# Altium PCB HANDS_FREE_ControlUnit_V1.PcbDoc (part 3 of 3)
Units mil, origin at the board's own origin, x right, y up, seen from the top; angles counter-clockwise.
Board outline 2372.03 x 3554.03 mil, 2 copper layers (Top Layer, Bottom Layer); 33 components, 66 nets, 337 pads, 84 vias.
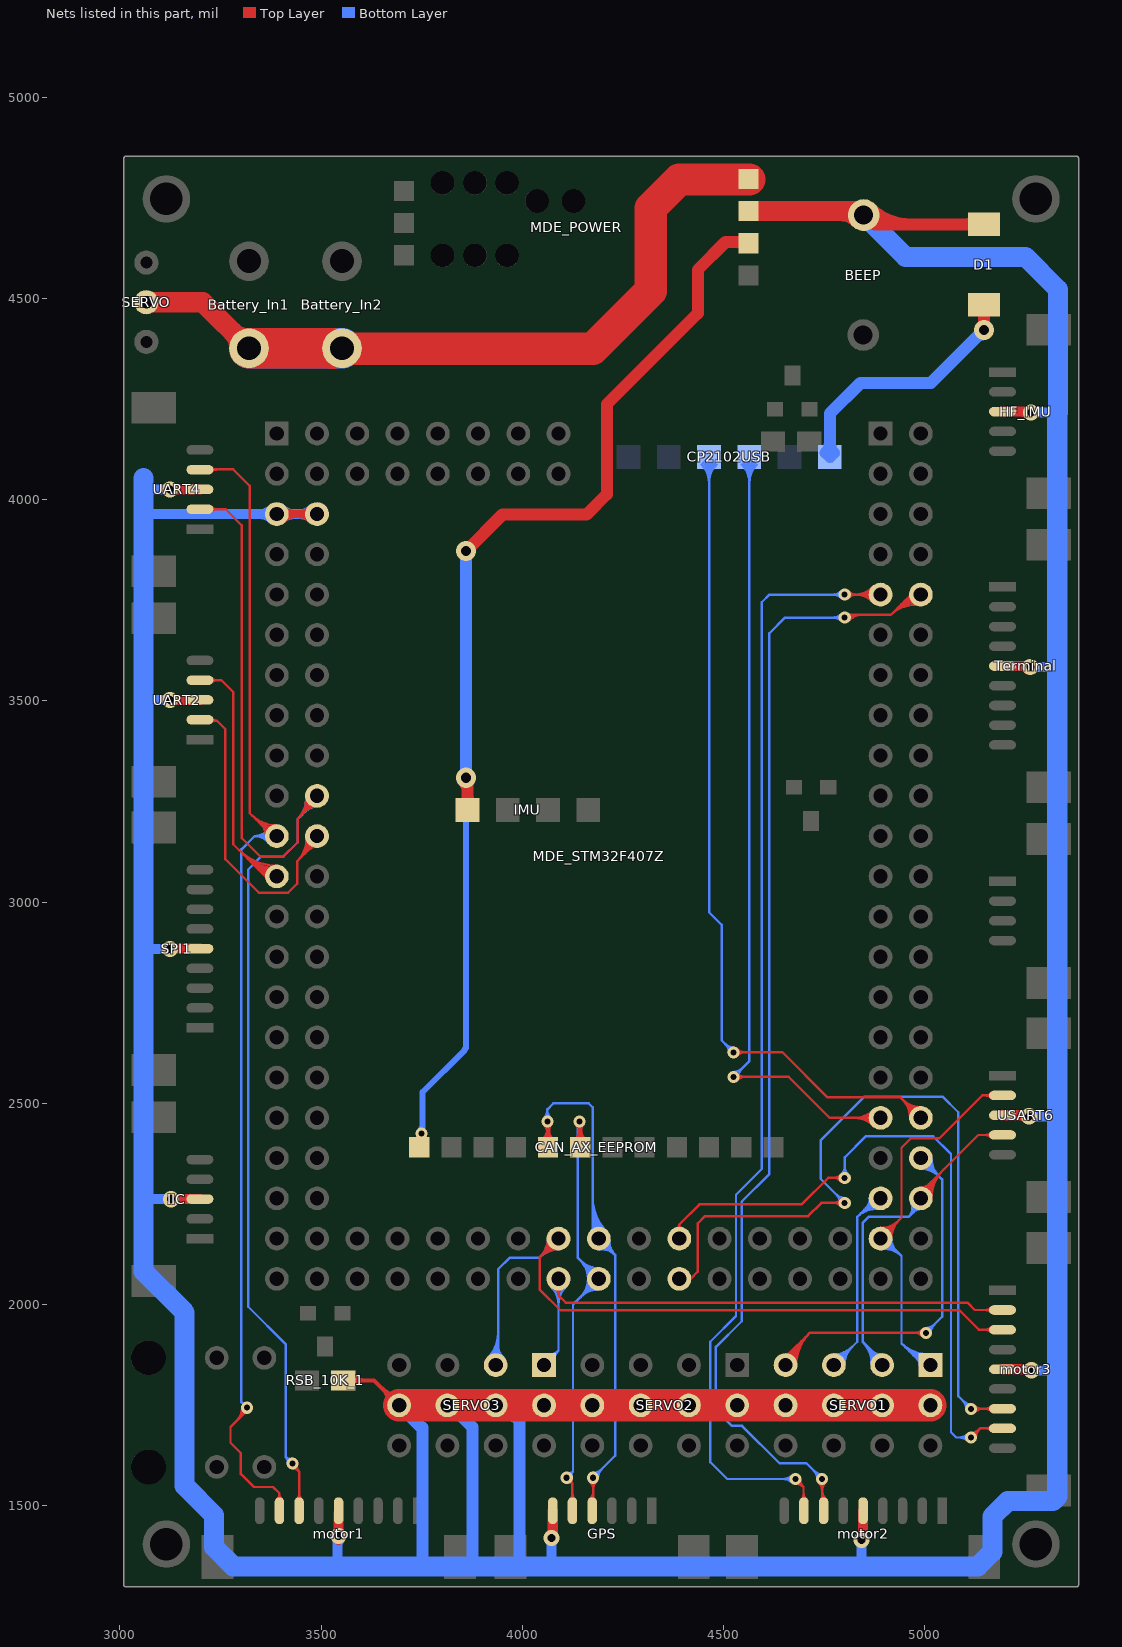
[diagram p3: the nets of this part, all layers, seen from the top]

## Via types
v1: diameter 30, hole 15, Top Layer to Bottom Layer, 70 vias
v2: diameter 40, hole 20, Top Layer to Bottom Layer, 11 vias
v3: diameter 50, hole 25, Top Layer to Bottom Layer, 3 vias

## Nets (pads, with @x,y where several pads share a name; then routed paths per layer and width w, separated by ;. In a path a pad name is that pad's centre, name@x,y a point inside that pad or via, vN(x,y) a via of type N, cw(c..) or ccw(c..) an arc to the next point about the centre after c; other vN are vias at no path point) (continued)
TIM2_ENCODR1_A: MDE_STM32F407Z.34 motor1.7 UART4.2 | length 3783.5
  Top Layer w6: UART4.2@3199,3976.21 3262.79,3976.21 3303,3936 3303,3159 3349,3113 3406,3113 3442,3149 3442,3207 ; UART4.2@3226.88,3969.98 cw(c3241.93,3954.94) 3241.93,3976.21 cw(c3241.93,3997.48) UART4.2@3226.88,3982.44 ; v1@3429,1593 cw(c3429,1571.27) 3444.36,1586.64 ; v1(3429,1605) 3429,1602 3445.57,1585.43 ; motor1.7@3439.34,1515.88 ccw(c3424.3,1530.93) 3445.57,1530.93 ccw(c3466.85,1530.93) motor1.7@3451.81,1515.88 ; v1@3440.7,1602.33 ccw(c3458.44,1598.29) 3445.57,1585.43 ; motor1.7@3445.57,1482 3445.57,1585.43 ; 3451.56,3216.56 ccw(c3408.08,3260.05) MDE_STM32F407Z.34@3469.5,3263.11 ; 3460.31,3225.31 cw(c3490,3195.63) MDE_STM32F407Z.34@3490,3237.61 ; 3461.12,3226.12 ccw(c3426.29,3260.96) MDE_STM32F407Z.34@3475.49,3263.41 ; MDE_STM32F407Z.34@3463.51,3262.81 cw(c3389.87,3259.14) 3442,3207 ; MDE_STM32F407Z.34@3465.14,3264.14 MDE_STM32F407Z.34@3490,3264.14 3490,3255 3442,3207 ; 3470.56,3235.56 cw(c3490,3216.11) MDE_STM32F407Z.34@3490,3243.61 ; 3470.68,3235.68 ccw(c3444.5,3261.87) MDE_STM32F407Z.34@3481.48,3263.71
  Bottom Layer w6: v1@3417.12,1606.68 ccw(c3399.22,1609.21) 3412,1622 ; v1@3427.32,1616.88 cw(c3424.79,1634.78) 3412,1622 ; v1(3429,1605) 3412,1622 ; 3451.45,3215.45 ccw(c3407.6,3259.3) MDE_STM32F407Z.34@3469.51,3262.93 ; 3460.9,3224.9 ccw(c3425.45,3260.35) MDE_STM32F407Z.34@3475.5,3263.29 ; 3462.02,3226.02 cw(c3490,3198.04) MDE_STM32F407Z.34@3490,3237.61 ; MDE_STM32F407Z.34@3463.52,3262.58 cw(c3389.75,3258.25) 3442,3206 ; 3470.35,3234.35 ccw(c3443.3,3261.4) MDE_STM32F407Z.34@3481.49,3263.64 ; 3472.26,3236.26 cw(c3490,3218.53) MDE_STM32F407Z.34@3490,3243.61 ; MDE_STM32F407Z.34@3490,3264.14 3490,3254 3442,3206 ; 3412,1622 3412,1902 3319,1995 3319,3081 3351,3113 3406,3113 3442,3149 3442,3206
TIM2_ENCODR1_B: MDE_STM32F407Z.35 motor1.8 UART4.4 | length 3494.1
  Top Layer w6: UART4.4@3192,4075 3282,4075 3323,4034 3323,3221 3379.86,3164.14 MDE_STM32F407Z.35@3390,3164.14 ; UART4.4@3226.88,4068.19 cw(c3243.31,4051.77) 3243.31,4075 ; UART4.4@3226.88,4080.66 ccw(c3240.54,4094.31) 3240.54,4075 ; 3290.56,1711.56 ccw(c3258.13,1744) v1@3304,1744 ; 3300.81,1721.81 ccw(c3278.62,1744) v1@3310,1744 ; 3307.46,1728.46 cw(c3316,1719.93) v1@3316,1732 ; v1@3311,1744 3311,1742 3316,1737 3275,1696 3275,1657 3301,1631 3301,1579 3333,1547 3381,1547 3396.57,1531.43 motor1.8@3396.57,1482 ; 3327.41,3216.59 ccw(c3390,3279.18) MDE_STM32F407Z.35@3390,3190.67 ; 3337.65,3206.35 ccw(c3390,3258.7) MDE_STM32F407Z.35@3390,3184.67 ; 3347.89,3196.11 ccw(c3390,3238.21) MDE_STM32F407Z.35@3390,3178.67 ; 3351.88,3192.12 cw(c3323.9,3164.14) MDE_STM32F407Z.35@3363.47,3164.14 ; 3358.14,3185.86 ccw(c3390,3217.73) MDE_STM32F407Z.35@3390,3172.67 ; 3362.13,3181.87 cw(c3344.39,3164.14) MDE_STM32F407Z.35@3369.47,3164.14 ; motor1.8@3390.34,1515.88 ccw(c3375.3,1530.93) 3396.57,1530.93 ccw(c3417.85,1530.93) motor1.8@3402.81,1515.88
  Bottom Layer w6: v1(3316,1744) 3302,1758 3302,3131 3335.14,3164.14 ; v1@3321.5,1751 v1@3328,1744.5 ; MDE_STM32F407Z.35@3369.21,3147.66 ccw(c3335.14,3120.67) 3335.14,3164.14 ; MDE_STM32F407Z.35@3369.21,3180.61 cw(c3335.14,3207.6) 3335.14,3164.14 ; MDE_STM32F407Z.35@3373.91,3151.39 ccw(c3347.55,3130.51) 3347.55,3164.14 ccw(c3347.55,3197.77) MDE_STM32F407Z.35@3373.91,3176.88 ; MDE_STM32F407Z.35@3378.61,3155.12 ccw(c3359.96,3140.34) 3359.96,3164.14 ccw(c3359.96,3187.94) MDE_STM32F407Z.35@3378.61,3173.16 ; MDE_STM32F407Z.35@3390,3164.14 3335.14,3164.14
TIM3_ENCODR2_A: MDE_STM32F407Z.134 motor2.7 | length 3443.7
  Top Layer w6: v1@4736.31,1558.51 cw(c4715.83,1538.03) 4744.8,1538.03 cw(c4773.77,1538.03) v1@4753.29,1558.51 ; motor2.7@4742.34,1515.88 ccw(c4736.42,1521.81) 4744.8,1521.81 ; 4744.8,1525.55 ccw(c4764.47,1525.55) motor2.7@4750.56,1511.64 ; 4744.8,1540.04 ccw(c4778.96,1540.04) motor2.7@4754.81,1515.88 ; v1(4744.8,1567) 4744.8,1484.77 motor2.7@4747.57,1482 ; v1@4805.24,3702.76 cw(c4832.38,3675.62) 4832.38,3714 ; v1@4809.49,3698.51 cw(c4846.87,3661.13) 4846.87,3714 ; 4817.9,3714 ccw(c4817.9,3690.1) v1(4801,3707) 4808,3714 4916,3714 ; 4924.58,3722.58 cw(c4977.38,3669.79) MDE_STM32F407Z.134@4987.28,3743.79 ; 4933.16,3731.16 cw(c4979.4,3684.93) MDE_STM32F407Z.134@4988.07,3749.74 ; 4941.74,3739.74 cw(c4981.43,3700.06) MDE_STM32F407Z.134@4988.87,3755.69 ; 4950.32,3748.32 cw(c4983.45,3715.2) MDE_STM32F407Z.134@4989.66,3761.63 ; 4958.9,3756.9 cw(c4985.48,3730.33) MDE_STM32F407Z.134@4990.46,3767.58 ; MDE_STM32F407Z.134@4986.48,3737.84 ccw(c4975.35,3654.66) 4916,3714 ; MDE_STM32F407Z.134@4990,3764.14 4966.14,3764.14 4916,3714
  Bottom Layer w6: v1@4732.8,1567 ccw(c4703.83,1567) 4724.31,1587.49 ccw(c4744.8,1607.97) v1@4744.8,1579 ; v1(4744.8,1567) 4705.8,1606 4639,1606 4546,1699 4521,1699 4481,1739 4481,1895 4545,1959 4545,2256 4614,2325 4614,3668 4653,3707 v1(4801,3707) v1@4813,3707 ; v1@4792.51,3698.51 ccw(c4772.03,3678.03) 4772.03,3707 ccw(c4772.03,3735.97) v1@4792.51,3715.49
TIM3_ENCODR2_B: MDE_STM32F407Z.135 motor2.8 | length 3262.6
  Top Layer w6: v1(4678.2,1567) 4698.57,1546.63 ; v1@4678.25,1555 cw(c4678.36,1526.41) 4698.57,1546.63 ; v1@4690.2,1566.95 ccw(c4718.79,1566.84) 4698.57,1546.63 ; motor2.8@4693.34,1515.88 ccw(c4680.72,1528.51) 4698.57,1528.51 ; motor2.8@4698.57,1482 4698.57,1546.63 ; 4698.57,1533.34 ccw(c4723.26,1533.34) motor2.8@4705.81,1515.88 ; v1(4801,3764.14) MDE_STM32F407Z.135@4890,3764.14 ; v1@4809.49,3755.65 cw(c4829.97,3735.17) 4829.97,3764.14 cw(c4829.97,3793.11) v1@4809.49,3772.62 ; MDE_STM32F407Z.135@4871.24,3745.38 ccw(c4825.96,3700.09) 4825.96,3764.14 ccw(c4825.96,3828.18) MDE_STM32F407Z.135@4871.24,3782.9 ; MDE_STM32F407Z.135@4875.48,3749.62 ccw(c4840.44,3714.58) 4840.44,3764.14 ccw(c4840.44,3813.7) MDE_STM32F407Z.135@4875.48,3778.65 ; MDE_STM32F407Z.135@4879.73,3753.87 ccw(c4854.93,3729.07) 4854.93,3764.14 ccw(c4854.93,3799.21) MDE_STM32F407Z.135@4879.73,3774.41
  Bottom Layer w6: v1@4669.71,1558.51 ccw(c4649.23,1538.03) 4649.23,1567 ccw(c4649.23,1595.97) v1@4669.71,1575.49 ; v1(4678.2,1567) 4509,1567 4467,1609 4467,1908 4531,1972 4531,2273 4595,2337 4595,3745 4614.14,3764.14 v1(4801,3764.14) ; v1@4792.51,3755.65 ccw(c4772.03,3735.17) 4772.03,3764.14 ccw(c4772.03,3793.11) v1@4792.51,3772.62
TIM4_ENCODR3_A: MDE_STM32F407Z.81 motor3.7 | length 2207.5
  Top Layer w6: MDE_STM32F407Z.81@4390,2064.14 4418.14,2064.14 4436,2082 4436,2202 4454,2220 4710,2220 4743,2253 v1(4801,2253) ; v1@4792.51,2244.51 ccw(c4772.03,2224.03) 4772.03,2253 ccw(c4772.03,2281.97) v1@4792.51,2261.49 ; v1(5115,1741) 5115.57,1741.57 motor3.7@5201,1741.57 ; v1@5119.24,1736.76 cw(c5130.87,1725.13) 5130.87,1741.57 ; v1@5123.49,1732.51 cw(c5145.36,1710.64) 5145.36,1741.57 ; v1@5123.49,1749.49 ccw(c5142.58,1768.58) 5142.58,1741.57 ; motor3.7@5165.12,1735.34 ccw(c5150.07,1720.3) 5150.07,1741.57 ccw(c5150.07,1762.85) motor3.7@5165.12,1747.81
  Bottom Layer w6: v1@4789,2253 ccw(c4760.03,2253) 4780.51,2273.49 ccw(c4801,2293.97) v1@4801,2265 ; v1(4801,2253) 4741,2313 4741,2408 4850,2517 5044,2517 5083,2478 5083,1773 v1(5115,1741) ; v1@5103,1741 ccw(c5074.03,1741) 5094.51,1761.49 ccw(c5115,1781.97) v1@5115,1753
TIM4_ENCODR3_B: MDE_STM32F407Z.82 motor3.8 | length 1930.9
  Top Layer w6: MDE_STM32F407Z.82@4382.93,2189.71 ccw(c4380.36,2199) 4390,2199 ; MDE_STM32F407Z.82@4390,2164.14 4390,2199 ; MDE_STM32F407Z.82@4397.07,2189.71 cw(c4399.64,2199) 4390,2199 ; v1@4792.51,2306.51 ccw(c4772.03,2286.03) 4772.03,2315 ccw(c4772.03,2343.97) v1@4792.51,2323.49 ; v1(4801,2315) 4760,2315 4694,2249 4440,2249 4390,2199 ; v1(5115,1670) 5137.57,1692.57 motor3.8@5201,1692.57 ; v1@5115,1682 ccw(c5115,1710.97) 5135.49,1690.49 ccw(c5155.97,1670) v1@5127,1670 ; motor3.8@5165.12,1686.34 ccw(c5150.07,1671.3) 5150.07,1692.57 ccw(c5150.07,1713.85) motor3.8@5165.12,1698.81
  Bottom Layer w6: v1@4792.51,2323.49 ccw(c4772.03,2343.97) 4801,2343.97 ccw(c4829.97,2343.97) v1@4809.49,2323.49 ; v1(4801,2315) 4801,2366 4853,2418 5021,2418 5065,2374 5065,1683 5078,1670 v1(5115,1670) ; v1@5106.51,1661.51 ccw(c5086.03,1641.03) 5086.03,1670 ccw(c5086.03,1698.97) v1@5106.51,1678.49
TIM8_PWMOUT1: MDE_STM32F407Z.96 SERVO1.1 USART6.2 | length 1728.9
  Top Layer w6: MDE_STM32F407Z.96@4890,2164.14 4942,2216.14 4942,2390 4965,2413 5036,2413 5142.79,2519.79 USART6.2@5201,2519.79 ; MDE_STM32F407Z.96@4890,2178.67 ccw(c4890,2213.74) 4914.8,2188.94 ccw(c4939.6,2164.14) MDE_STM32F407Z.96@4904.53,2164.14 ; MDE_STM32F407Z.96@4890,2184.67 ccw(c4890,2234.22) 4925.04,2199.18 ccw(c4960.09,2164.14) MDE_STM32F407Z.96@4910.53,2164.14 ; MDE_STM32F407Z.96@4890,2190.67 ccw(c4890,2254.71) 4935.29,2209.42 ccw(c4980.57,2164.14) MDE_STM32F407Z.96@4916.53,2164.14 ; USART6.2@5165.12,2513.56 ccw(c5150.07,2498.52) 5150.07,2519.79 ccw(c5150.07,2541.06) USART6.2@5165.12,2526.02
  Bottom Layer w6: MDE_STM32F407Z.96@4890,2164.14 4898.86,2164.14 4942,2121 ; MDE_STM32F407Z.96@4891.04,2155.67 cw(c4894.68,2125.9) 4915.89,2147.11 ; MDE_STM32F407Z.96@4891.77,2149.72 cw(c4896.58,2110.39) 4924.59,2138.41 ; MDE_STM32F407Z.96@4892.49,2143.76 cw(c4898.48,2094.89) 4933.29,2129.7 ; MDE_STM32F407Z.96@4893.22,2137.81 cw(c4900.38,2079.38) 4942,2121 ; MDE_STM32F407Z.96@4910.53,2164.14 ccw(c4938.69,2164.14) 4918.78,2144.22 ; MDE_STM32F407Z.96@4916.53,2164.14 ccw(c4959.17,2164.14) 4929.02,2133.98 ; 4951.63,1894.37 ccw(c5009.43,1952.17) SERVO1.1@5013.08,1870.51 ; 4961.26,1884.74 ccw(c5010.26,1933.74) SERVO1.1@5013.35,1864.51 ; 4970.89,1875.11 ccw(c5011.08,1915.3) SERVO1.1@5013.62,1858.52 ; 4980.52,1865.48 ccw(c5011.91,1896.87) SERVO1.1@5013.89,1852.52 ; 4981.44,1864.56 cw(c4966.89,1850) SERVO1.1@4987.47,1850 ; SERVO1.1@5012.82,1876.5 cw(c5008.61,1970.6) 4942,1904 ; SERVO1.1@5014,1850 4996,1850 4942,1904 ; 4942,1904 4942,2121
TIM8_PWMOUT2: MDE_STM32F407Z.97 SERVO1.4 USART6.4 | length 1558.6
  Top Layer w6: MDE_STM32F407Z.97@4990,2264.14 4990,2279 5132.57,2421.57 USART6.4@5201,2421.57 ; MDE_STM32F407Z.97@4990,2290.67 ccw(c4990,2318.83) 5009.91,2298.91 ; MDE_STM32F407Z.97@4992.53,2264.14 cw(c5034.51,2264.14) 5004.82,2293.82 ; MDE_STM32F407Z.97@4998.53,2264.14 cw(c5055,2264.14) 5015.07,2304.07 ; MDE_STM32F407Z.97@5004.53,2264.14 cw(c5075.48,2264.14) 5025.31,2314.31 ; MDE_STM32F407Z.97@5010.53,2264.14 cw(c5095.97,2264.14) 5035.55,2324.55 ; MDE_STM32F407Z.97@5016.53,2264.14 cw(c5116.45,2264.14) 5045.79,2334.79 ; USART6.4@5165.12,2415.34 ccw(c5150.07,2400.3) 5150.07,2421.57 ccw(c5150.07,2442.85) USART6.4@5165.12,2427.81
  Bottom Layer w6: 4855.58,1897.42 cw(c4812.15,1853.99) SERVO1.4@4873.5,1851 ; 4864.08,1888.92 ccw(c4894,1918.84) SERVO1.4@4894,1876.53 ; 4865.16,1887.84 cw(c4830.41,1853.1) SERVO1.4@4879.49,1850.71 ; SERVO1.4@4867.5,1851.29 ccw(c4793.88,1854.88) 4846,1907 ; 4874.32,1878.68 ccw(c4894,1898.36) SERVO1.4@4894,1870.53 ; 4874.73,1878.27 cw(c4848.67,1852.21) SERVO1.4@4885.48,1850.41 ; SERVO1.4@4894,1850 4894,1859 4846,1907 ; 4966.02,2224.02 ccw(c4946.51,2243.54) MDE_STM32F407Z.97@4971.45,2255.35 ; MDE_STM32F407Z.97@4966.03,2252.78 cw(c4938.34,2239.67) 4960,2218 ; 4972.04,2230.04 ccw(c4954.68,2247.41) MDE_STM32F407Z.97@4976.87,2257.92 ; 4972.26,2230.26 cw(c4990,2212.53) MDE_STM32F407Z.97@4990,2237.61 ; 4978.06,2236.06 ccw(c4962.85,2251.28) MDE_STM32F407Z.97@4982.29,2260.49 ; MDE_STM32F407Z.97@4990,2264.14 4990,2248 4960,2218 ; 4846,1907 4846,2204 4860,2218 4960,2218
TIM8_PWMOUT3: MDE_STM32F407Z.98 SERVO1.7 | length 934.9
  Bottom Layer w6: SERVO1.7@4774,1850 4832,1908 4832,2218 ; SERVO1.7@4774,1864.53 ccw(c4774,1899.6) 4798.8,1874.8 ccw(c4823.6,1850) SERVO1.7@4788.53,1850 ; SERVO1.7@4774,1870.53 ccw(c4774,1920.09) 4809.04,1885.04 ccw(c4844.09,1850) SERVO1.7@4794.53,1850 ; SERVO1.7@4774,1876.53 ccw(c4774,1940.57) 4819.29,1895.29 ccw(c4864.57,1850) SERVO1.7@4800.53,1850 ; 4840.95,2226.95 cw(c4882.12,2185.78) MDE_STM32F407Z.98@4887.95,2243.71 ; 4849.9,2235.9 cw(c4883.76,2202.04) MDE_STM32F407Z.98@4888.55,2249.68 ; 4853.1,2239.1 ccw(c4828.07,2264.14) MDE_STM32F407Z.98@4863.47,2264.14 ; 4858.84,2244.84 cw(c4885.39,2218.3) MDE_STM32F407Z.98@4889.15,2255.65 ; 4863.35,2249.35 ccw(c4848.55,2264.14) MDE_STM32F407Z.98@4869.47,2264.14 ; MDE_STM32F407Z.98@4887.35,2237.74 ccw(c4880.49,2169.51) 4832,2218 ; MDE_STM32F407Z.98@4890,2264.14 4878.14,2264.14 4832,2218
TIM8_PWMOUT4: MDE_STM32F407Z.99 SERVO1.10 | length 1536.6
  Top Layer w6: SERVO1.10@4654,1850 4654,1870 4714,1930 v1(5003,1930) ; SERVO1.10@4654,1876.53 ccw(c4654,1892.29) 4665.14,1881.14 ; SERVO1.10@4656.53,1850 cw(c4710.91,1850) 4672.46,1888.46 ; SERVO1.10@4662.53,1850 cw(c4731.4,1850) 4682.7,1898.7 ; SERVO1.10@4668.53,1850 cw(c4751.88,1850) 4692.94,1908.94 ; SERVO1.10@4674.53,1850 cw(c4772.37,1850) 4703.18,1919.18 ; SERVO1.10@4680.53,1850 cw(c4792.85,1850) 4713.43,1929.43 ; v1@4994.51,1921.51 ccw(c4974.03,1901.03) 4974.03,1930 ccw(c4974.03,1958.97) v1@4994.51,1938.49
  Bottom Layer w6: MDE_STM32F407Z.99@4990,2337.61 cw(c4990,2273.57) 5035.29,2318.85 cw(c5080.57,2364.14) MDE_STM32F407Z.99@5016.53,2364.14 ; MDE_STM32F407Z.99@4990,2343.61 cw(c4990,2294.05) 5025.04,2329.09 cw(c5060.09,2364.14) MDE_STM32F407Z.99@5010.53,2364.14 ; MDE_STM32F407Z.99@4990,2349.61 cw(c4990,2314.54) 5014.8,2339.34 cw(c5039.6,2364.14) MDE_STM32F407Z.99@5004.53,2364.14 ; MDE_STM32F407Z.99@4990,2370 MDE_STM32F407Z.99@4990,2364.14 5043,2311.14 5043,1970 v1(5003,1930) ; v1@5003,1942 ccw(c5003,1970.97) 5023.49,1950.49 ccw(c5043.97,1930) v1@5015,1930
TIM12_PWMOUT1: MDE_STM32F407Z.75 motor3.2 SERVO3.1 | length 1860.1
  Top Layer w6: MDE_STM32F407Z.75@4079.06,2039.97 cw(c4071.37,2023) 4090,2023 ; MDE_STM32F407Z.75@4081.53,2045.44 cw(c4075.58,2032.31) 4090,2032.31 cw(c4104.42,2032.31) MDE_STM32F407Z.75@4098.47,2045.44 ; MDE_STM32F407Z.75@4090,2064.14 4090,2023 ; MDE_STM32F407Z.75@4100.94,2039.97 ccw(c4108.63,2023) 4090,2023 ; motor3.2@5165.12,1980.56 ccw(c5150.07,1965.52) 5150.07,1986.79 ccw(c5150.07,2008.06) motor3.2@5165.12,1993.02 ; motor3.2@5201,1986.79 5124.21,1986.79 5106,2005 4108,2005 4090,2023
  Bottom Layer w6: SERVO3.1@4054,1850 4090,1886 ; SERVO3.1@4057.58,1870.21 ccw(c4062.38,1897.33) 4081.86,1877.86 ccw(c4101.33,1858.38) SERVO3.1@4074.21,1853.58 ; SERVO3.1@4058.63,1876.12 ccw(c4064.84,1911.16) 4090,1886 ; MDE_STM32F407Z.75@4071.24,2045.38 cw(c4025.96,2000.09) 4090,2000.09 cw(c4154.04,2000.09) MDE_STM32F407Z.75@4108.76,2045.38 ; MDE_STM32F407Z.75@4075.48,2049.62 cw(c4040.44,2014.58) 4090,2014.58 cw(c4139.56,2014.58) MDE_STM32F407Z.75@4104.52,2049.62 ; MDE_STM32F407Z.75@4079.73,2053.87 cw(c4054.93,2029.07) 4090,2029.07 cw(c4125.07,2029.07) MDE_STM32F407Z.75@4100.27,2053.87 ; SERVO3.1@4080.12,1854.63 cw(c4115.16,1860.84) 4090,1886 ; MDE_STM32F407Z.75@4090,2064.14 4090,1886
TIM12_PWMOUT2: MDE_STM32F407Z.76 motor3.3 SERVO3.4 | length 2531.2
  Top Layer w6: MDE_STM32F407Z.76@4063.47,2164.14 cw(c3999.43,2164.14) 4044.71,2118.85 cw(c4090,2073.57) MDE_STM32F407Z.76@4090,2137.61 ; MDE_STM32F407Z.76@4069.47,2164.14 cw(c4019.91,2164.14) 4054.96,2129.09 cw(c4090,2094.05) MDE_STM32F407Z.76@4090,2143.61 ; MDE_STM32F407Z.76@4075.47,2164.14 cw(c4040.4,2164.14) 4065.2,2139.34 cw(c4090,2114.54) MDE_STM32F407Z.76@4090,2149.61 ; MDE_STM32F407Z.76@4090,2155 MDE_STM32F407Z.76@4090,2164.14 4043,2117.14 4043,2038 4095,1986 5086,1986 5134.43,1937.57 motor3.3@5201,1937.57 ; motor3.3@5165.12,1931.34 ccw(c5150.07,1916.3) 5150.07,1937.57 ccw(c5150.07,1958.85) motor3.3@5165.12,1943.81
  Bottom Layer w6: SERVO3.4@3915.24,1868.76 ccw(c3855.47,1928.53) 3940,1928.53 ; SERVO3.4@3919.48,1864.52 ccw(c3869.96,1914.04) 3940,1914.04 ; SERVO3.4@3923.73,1860.27 ccw(c3884.44,1899.56) 3940,1899.56 ccw(c3983.56,1899.56) SERVO3.4@3952.76,1868.76 ; SERVO3.4@3927.97,1856.03 ccw(c3898.93,1885.07) 3940,1885.07 ccw(c3969.07,1885.07) SERVO3.4@3948.52,1864.52 ; SERVO3.4@3934,1850 3940,1856 3940,2088 3969,2117 4042.86,2117 MDE_STM32F407Z.76@4090,2164.14 ; MDE_STM32F407Z.76@4063.47,2164.14 cw(c3999.43,2164.14) 4044.71,2118.85 cw(c4090,2073.57) MDE_STM32F407Z.76@4090,2137.61 ; MDE_STM32F407Z.76@4069.47,2164.14 cw(c4019.91,2164.14) 4054.96,2129.09 cw(c4090,2094.05) MDE_STM32F407Z.76@4090,2143.61 ; MDE_STM32F407Z.76@4075.47,2164.14 cw(c4040.4,2164.14) 4065.2,2139.34 cw(c4090,2114.54) MDE_STM32F407Z.76@4090,2149.61
USART1_RX: CP2102USB.4 MDE_STM32F407Z.102 | length 2521.1
  Top Layer w6: v1(4525,2566) 4662,2566 4763.86,2464.14 MDE_STM32F407Z.102@4890,2464.14 ; v1@4533.49,2557.51 cw(c4553.97,2537.03) 4553.97,2566 cw(c4553.97,2594.97) v1@4533.49,2574.49 ; MDE_STM32F407Z.102@4871.24,2445.38 ccw(c4825.96,2400.09) 4825.96,2464.14 ccw(c4825.96,2528.18) MDE_STM32F407Z.102@4871.24,2482.9 ; MDE_STM32F407Z.102@4875.48,2449.62 ccw(c4840.44,2414.58) 4840.44,2464.14 ccw(c4840.44,2513.7) MDE_STM32F407Z.102@4875.48,2478.65 ; MDE_STM32F407Z.102@4879.73,2453.87 ccw(c4854.93,2429.07) 4854.93,2464.14 ccw(c4854.93,2499.21) MDE_STM32F407Z.102@4879.73,2474.41
  Bottom Layer w6: v1(4525,2566) 4564,2605 CP2102USB.4@4564,4106 ; v1@4525,2578 ccw(c4525,2606.97) 4545.49,2586.49 ccw(c4565.97,2566) v1@4537,2566 ; CP2102USB.4@4545.26,4087.26 cw(c4500.02,4042.02) 4564,4042.02 cw(c4627.98,4042.02) CP2102USB.4@4582.74,4087.26 ; CP2102USB.4@4549.5,4091.5 cw(c4514.51,4056.51) 4564,4056.51 cw(c4613.49,4056.51) CP2102USB.4@4578.5,4091.5 ; CP2102USB.4@4553.75,4095.75 cw(c4528.99,4070.99) 4564,4070.99 cw(c4599.01,4070.99) CP2102USB.4@4574.25,4095.75
USART1_TX: CP2102USB.3 MDE_STM32F407Z.101 | length 2594.5
  Top Layer w6: v1(4525,2627) 4646,2627 4758,2515 4939.14,2515 MDE_STM32F407Z.101@4990,2464.14 ; v1@4533.49,2618.51 cw(c4553.97,2598.03) 4553.97,2627 cw(c4553.97,2655.97) v1@4533.49,2635.49 ; MDE_STM32F407Z.101@4963.47,2464.14 ccw(c4899.43,2464.14) 4944.71,2509.42 ccw(c4990,2554.71) MDE_STM32F407Z.101@4990,2490.67 ; MDE_STM32F407Z.101@4969.47,2464.14 ccw(c4919.91,2464.14) 4954.96,2499.18 ccw(c4990,2534.22) MDE_STM32F407Z.101@4990,2484.67 ; MDE_STM32F407Z.101@4975.47,2464.14 ccw(c4940.4,2464.14) 4965.2,2488.94 ccw(c4990,2513.74) MDE_STM32F407Z.101@4990,2478.67
  Bottom Layer w6: CP2102USB.3@4445.26,4087.26 cw(c4400.02,4042.02) 4464,4042.02 cw(c4527.98,4042.02) CP2102USB.3@4482.74,4087.26 ; CP2102USB.3@4449.5,4091.5 cw(c4414.51,4056.51) 4464,4056.51 cw(c4513.49,4056.51) CP2102USB.3@4478.5,4091.5 ; CP2102USB.3@4453.75,4095.75 cw(c4428.99,4070.99) 4464,4070.99 cw(c4499.01,4070.99) CP2102USB.3@4474.25,4095.75 ; CP2102USB.3@4464,4106 4464,2975 4495,2944 4495,2657 v1(4525,2627) ; v1@4513,2627 ccw(c4484.03,2627) 4504.51,2647.49 ccw(c4525,2667.97) v1@4525,2639
USART2_RX: MDE_STM32F407Z.37 UART2.4 | length 1134.3
  Top Layer w6: UART2.4@3199,3551.43 3252.57,3551.43 3282,3522 3282,3144 3361.86,3064.14 MDE_STM32F407Z.37@3390,3064.14 ; UART2.4@3226.88,3545.19 cw(c3241.93,3530.15) 3241.93,3551.43 cw(c3241.93,3572.7) UART2.4@3226.88,3557.66 ; 3296.68,3129.32 ccw(c3390,3222.64) MDE_STM32F407Z.37@3390,3090.67 ; 3306.92,3119.08 ccw(c3390,3202.15) MDE_STM32F407Z.37@3390,3084.67 ; 3317.17,3108.83 ccw(c3390,3181.67) MDE_STM32F407Z.37@3390,3078.67 ; 3327.41,3098.59 ccw(c3390,3161.18) MDE_STM32F407Z.37@3390,3072.67 ; 3337.65,3088.35 ccw(c3390,3140.7) MDE_STM32F407Z.37@3390,3066.67 ; 3347.89,3078.11 ccw(c3390,3120.21) MDE_STM32F407Z.37@3390,3060.67 ; 3358.14,3067.86 ccw(c3390,3099.73) MDE_STM32F407Z.37@3390,3054.67
USART2_TX: MDE_STM32F407Z.36 UART2.2 | length 1004.2
  Top Layer w6: UART2.2@3209,3451 3241,3451 ; UART2.2@3226.88,3446.98 cw(c3236.58,3437.28) 3236.58,3451 ; UART2.2@3228.03,3458.02 ccw(c3241,3466.48) 3241,3451 ; 3450.31,3111.31 ccw(c3403.54,3158.08) MDE_STM32F407Z.36@3469.52,3162.7 ; 3459.62,3120.62 ccw(c3420.94,3159.3) MDE_STM32F407Z.36@3475.51,3163.12 ; MDE_STM32F407Z.36@3463.54,3162.28 cw(c3386.14,3156.86) 3441,3102 ; 3467.14,3128.14 cw(c3490,3105.28) MDE_STM32F407Z.36@3490,3137.61 ; 3468.93,3129.93 ccw(c3438.34,3160.52) MDE_STM32F407Z.36@3481.49,3163.54 ; MDE_STM32F407Z.36@3490,3164.14 3479,3153.14 3479,3140 3441,3102 ; 3241,3451 3262,3430 3262,3107 3345.39,3023.61 3418.61,3023.61 3441,3046 3441,3102
USART3_RX: CAN_AX_EEPROM.8 GPS.4 MDE_STM32F407Z.78 | length 2317
  Top Layer w6: CAN_AX_EEPROM.8@4048.44,2406.56 ccw(c4015.03,2439.97) 4062.29,2439.97 ; CAN_AX_EEPROM.8@4052.69,2402.31 ccw(c4029.51,2425.49) 4062.29,2425.49 ; v1@4053.8,2446.51 cw(c4033.32,2426.03) 4062.29,2426.03 cw(c4091.26,2426.03) v1@4070.77,2446.51 ; v1@4055.9,2444.84 cw(c4043.23,2424.65) 4066.47,2429.96 ; CAN_AX_EEPROM.8@4062,2375 4062,2391 4062.29,2391.29 v1(4062.29,2455) ; 4062.29,2419.28 ccw(c4092.28,2419.28) CAN_AX_EEPROM.8@4071.07,2398.07 ; 4062.29,2433.77 ccw(c4106.77,2433.77) CAN_AX_EEPROM.8@4075.31,2402.31 ; v1@4062.29,2448.25 ccw(c4121.25,2448.25) CAN_AX_EEPROM.8@4079.56,2406.56 ; 4064.5,2438.56 cw(c4080.04,2442.11) v1@4067.14,2451.47 ; 4067.44,2425.68 cw(c4094.24,2431.8) v1@4072,2447.95 ; GPS.4@4167.34,1515.88 ccw(c4146.45,1536.78) 4176,1536.78 ; v1@4167.51,1561.51 cw(c4147.03,1541.03) 4176,1541.03 cw(c4204.97,1541.03) v1@4184.49,1561.51 ; GPS.4@4171.59,1511.64 ccw(c4160.93,1522.29) 4176,1522.29 ; GPS.4@4173.57,1482 4176,1484.43 v1(4176,1570) ; 4176,1525.07 ccw(c4188.99,1525.07) GPS.4@4179.81,1515.88
  Bottom Layer w6: v1@4053.8,2463.49 ccw(c4033.32,2483.97) 4062.29,2483.97 ccw(c4091.26,2483.97) v1@4070.77,2463.49 ; v1(4062.29,2455) 4062.29,2485.29 4077,2500 4165,2500 4175,2490 4175,2179.14 MDE_STM32F407Z.78@4190,2164.14 4230.53,2123.61 ; MDE_STM32F407Z.78@4171.24,2182.9 ccw(c4162.17,2191.97) 4175,2191.97 ccw(c4217.83,2191.97) MDE_STM32F407Z.78@4187.54,2161.68 ; 4175,2206.45 ccw(c4232.32,2206.45) MDE_STM32F407Z.78@4191.79,2165.92 ; 4175,2220.94 ccw(c4246.8,2220.94) MDE_STM32F407Z.78@4196.03,2170.17 ; 4175,2235.42 ccw(c4261.29,2235.42) MDE_STM32F407Z.78@4200.27,2174.41 ; 4175,2249.91 ccw(c4275.77,2249.91) MDE_STM32F407Z.78@4204.52,2178.65 ; 4175,2264.39 ccw(c4290.26,2264.39) MDE_STM32F407Z.78@4208.76,2182.9 ; v1(4176,1570) 4230.53,1624.53 4230.53,2123.61 ; v1@4176,1582 ccw(c4176,1610.97) 4196.49,1590.49 ccw(c4216.97,1570) v1@4188,1570 ; MDE_STM32F407Z.78@4191.18,2149.66 cw(c4193.36,2123.11) 4212.19,2141.94 cw(c4231.03,2160.78) MDE_STM32F407Z.78@4204.48,2162.95 ; MDE_STM32F407Z.78@4191.67,2143.68 cw(c4194.74,2106.16) 4221.36,2132.78 cw(c4247.98,2159.4) MDE_STM32F407Z.78@4210.46,2162.46 ; MDE_STM32F407Z.78@4192.16,2137.7 cw(c4196.13,2089.21) 4230.53,2123.61 ; MDE_STM32F407Z.78@4216.44,2161.98 ccw(c4264.92,2158.01) 4230.53,2123.61
USART3_TX: CAN_AX_EEPROM.7 GPS.5 MDE_STM32F407Z.77 | length 2052.1
  Top Layer w6: v1(4110.33,1570) 4124.57,1555.76 ; v1@4113.76,1558.5 cw(c4116.87,1548.05) 4124.57,1555.76 ; GPS.5@4118.34,1515.88 ccw(c4103.3,1530.93) 4124.57,1530.93 ccw(c4145.85,1530.93) GPS.5@4130.81,1515.88 ; v1@4121.83,1566.58 ccw(c4132.28,1563.47) 4124.57,1555.76 ; GPS.5@4124.57,1482 4124.57,1555.76 ; CAN_AX_EEPROM.7@4128.44,2406.56 ccw(c4094.68,2440.32) v1@4142.43,2440.32 ; CAN_AX_EEPROM.7@4132.69,2402.31 ccw(c4109.17,2425.83) 4142.43,2425.83 ; v1@4133.94,2446.51 cw(c4113.46,2426.03) 4142.43,2426.03 cw(c4171.4,2426.03) v1@4150.91,2446.51 ; v1@4134.51,2445.99 cw(c4122.71,2432.57) 4140.24,2429.14 ; v1@4136.04,2444.84 cw(c4123.46,2424.87) 4146.48,2430.1 ; v1@4138.47,2450.49 cw(c4130.69,2441.65) 4142.25,2439.39 ; 4140.94,2432.7 cw(c4159.93,2428.99) v1@4149.13,2445.04 ; CAN_AX_EEPROM.7@4142,2391 4142.43,2391.43 v1(4142.43,2455) ; 4142.43,2418.94 ccw(c4171.94,2418.94) CAN_AX_EEPROM.7@4151.07,2398.07 ; 4142.43,2433.42 ccw(c4186.42,2433.42) CAN_AX_EEPROM.7@4155.31,2402.31 ; v1@4142.43,2447.91 ccw(c4200.91,2447.91) CAN_AX_EEPROM.7@4159.56,2406.56 ; 4144.55,2438.57 cw(c4159.91,2442.06) v1@4147.25,2451.43 ; 4147.45,2425.83 cw(c4173.75,2431.81) v1@4152.07,2447.86 ; MDE_STM32F407Z.77@4190,2064.14 MDE_STM32F407Z.77@4190,2083
  Bottom Layer w6: v1(4110.33,1570) 4126,1585.67 ; v1@4112.8,1581.74 ccw(c4115.78,1595.89) 4126,1585.67 ; v1@4122.08,1572.47 cw(c4136.22,1575.45) 4126,1585.67 ; v1@4133.94,2446.51 cw(c4124.15,2436.72) 4138,2436.72 ; 4138,2415.34 cw(c4182.09,2415.34) v1@4150.91,2446.51 ; 4138,2429.82 cw(c4167.6,2429.82) v1@4146.67,2450.76 ; v1@4138,2455 4138,2116.14 MDE_STM32F407Z.77@4190,2064.14 4126,2000.14 4126,1585.67 ; MDE_STM32F407Z.77@4190,2037.61 ccw(c4190,1973.57) 4144.71,2018.85 ccw(c4099.43,2064.14) 4163.47,2064.14 ccw(c4099.43,2064.14) 4144.71,2109.42 ccw(c4190,2154.71) MDE_STM32F407Z.77@4190,2090.67 ; MDE_STM32F407Z.77@4190,2043.61 ccw(c4190,1994.05) 4154.96,2029.09 ccw(c4119.91,2064.14) 4169.47,2064.14 ccw(c4119.91,2064.14) 4154.96,2099.18 ccw(c4190,2134.22) MDE_STM32F407Z.77@4190,2084.67 ; MDE_STM32F407Z.77@4190,2049.61 ccw(c4190,2014.54) 4165.2,2039.34 ccw(c4140.4,2064.14) 4175.47,2064.14 ccw(c4140.4,2064.14) 4165.2,2088.94 ccw(c4190,2113.74) MDE_STM32F407Z.77@4190,2078.67
VCC3.3V_CHIP: CAN_AX_EEPROM.12 IMU.1 MDE_POWER.3 | length 3089.3
  Top Layer w15: CAN_AX_EEPROM.12@3737.82,2407.37 ccw(c3731.16,2425) v1(3750,2425) 3750,2399 CAN_AX_EEPROM.12@3742,2391 ; v1@3744.7,2419.7 cw(c3731.89,2406.89) 3750,2406.89 cw(c3768.11,2406.89) v1@3755.3,2419.7 ; v1@3750,2418.76 ccw(c3771.76,2418.76) CAN_AX_EEPROM.12@3756.37,2403.37
  Top Layer w30: v3@3852.93,3301.93 cw(c3826.2,3275.2) 3864,3275.2 ; IMU.1@3853.75,3239.25 ccw(c3828.99,3264.01) 3864,3264.01 ccw(c3899.01,3264.01) IMU.1@3874.25,3239.25 ; v3(3860,3309) 3864,3305 IMU.1@3864,3229 ; v3(3860,3872) 3951,3963 4160,3963 4210,4013 4210,4237 4436,4463 4436,4571 4505,4640 MDE_POWER.3@4559,4640 ; 4530.62,4640 cw(c4530.62,4605.62) MDE_POWER.3@4554.93,4629.93
  Bottom Layer w15: v1@3744.7,2430.3 ccw(c3727.07,2447.93) 3752,2447.93 ; v1@3752,2424 3752,2528 3856.5,2632.5 3856.5,2633.66 3860,2637.16 v3(3860,3309) ; v3@3847.63,3296.63 cw(c3817.75,3266.75) 3860,3266.75 cw(c3902.25,3266.75) v3@3872.37,3296.63
  Bottom Layer w30: v3(3860,3309) v3(3860,3872)
VCC5V_CHIP: BEEP.1 D1.2 GPS.6 HF_IMU.3 IIC.3 MDE_POWER.2 MDE_STM32F407Z.200 MDE_STM32F407Z.201 motor1.5 motor2.5 motor3.5 RSB_10K_1.2 SERVO1.2 SERVO1.5 SERVO1.8 SERVO1.11 SERVO2.2 SERVO2.5 SERVO2.8 SERVO2.11 SERVO3.2 SERVO3.5 SERVO3.8 SERVO3.11 SPI1.5 Terminal.5 UART2.3 UART4.3 USART6.3 | length 15159.9
  Top Layer w10: RSB_10K_1.2@3564.06,1803 RSB_10K_1.2@3555.06,1812 3632,1812 SERVO3.11@3694,1750 ; RSB_10K_1.2@3574.21,1797.86 cw(c3608.35,1763.72) 3608.35,1812 cw(c3608.35,1860.28) RSB_10K_1.2@3574.21,1826.14 ; SERVO3.11@3669.47,1750 ccw(c3610.26,1750) 3652.13,1791.87 ccw(c3694,1833.74) SERVO3.11@3694,1774.53 ; SERVO3.11@3679.47,1750 ccw(c3644.4,1750) 3669.2,1774.8 ccw(c3694,1799.6) SERVO3.11@3694,1764.53
  Top Layer w20: MDE_STM32F407Z.201@3390,3964.14 MDE_STM32F407Z.200@3490,3964.14 ; MDE_STM32F407Z.201@3403.81,3950.33 cw(c3437.14,3916.99) 3437.14,3964.14 cw(c3437.14,4011.28) MDE_STM32F407Z.201@3403.81,3977.95 ; MDE_STM32F407Z.200@3476.19,3950.33 ccw(c3442.86,3916.99) 3442.86,3964.14 ccw(c3442.86,4011.28) MDE_STM32F407Z.200@3476.19,3977.95
  Top Layer w25: v2(3125,2884) 3125.43,2884.43 SPI1.5@3199,2884.43 ; v2(3125,3502) 3125.43,3502.43 UART2.3@3199,3502.43 ; v2(3125,4025) 3125.43,4025.43 UART4.3@3199,4025.43 ; v2(3127,2262) 3127.43,2262.43 IIC.3@3201,2262.43 ; v2@3543.57,1415.57 motor1.5@3543.57,1482 ; v2@4067.7,1425.3 ccw(c4048.68,1444.32) 4075.57,1444.32 ; v2(4073,1420) 4075.57,1422.57 GPS.6@4075.57,1489 ; v2@4837.7,1420.3 ccw(c4816.26,1441.74) 4846.57,1441.74 ; v2(4843,1415) 4846.57,1418.57 motor2.5@4846.57,1488 ; USART6.3@5190,2470.57 5256.43,2470.57 v2(5259,2468) ; motor3.5@5193,1839.57 5262.43,1839.57 v2(5265,1837) ; Terminal.5@5193,3586.57 5259.43,3586.57 v2(5262,3584) ; HF_IMU.3@5195,4218.57 5261.43,4218.57 v2(5264,4216) ; 5234.68,2470.57 cw(c5234.68,2443.68) v2@5253.7,2462.7 ; 5237.68,3586.57 cw(c5237.68,3559.68) v2@5256.7,3578.7 ; 5239.68,4218.57 cw(c5239.68,4191.68) v2@5258.7,4210.7 ; 5240.68,1839.57 cw(c5240.68,1812.68) v2@5259.7,1831.7
  Top Layer w30: BEEP.1@4844.02,4703.02 ccw(c4889.94,4748.94) 4889.94,4684 ; BEEP.1@4848,4707 4854,4701 4859,4701 4876,4684 D1.2@5147,4684 ; BEEP.1@4865.23,4724.23 ccw(c4962.36,4821.36) 4962.36,4684 ; D1.2@5126.89,4673.73 ccw(c5102.09,4648.93) 5102.09,4684 ccw(c5102.09,4719.07) D1.2@5126.89,4694.27
  Top Layer w50: MDE_POWER.2@4564,4717 4838,4717 BEEP.1@4848,4707 ; 4789.17,4717 cw(c4789.17,4648.17) BEEP.1@4837.84,4696.84
  Top Layer w80: SERVO3.11@3694,1750 SERVO3.8@3814,1750 SERVO3.5@3934,1750 SERVO3.2@4054,1750 SERVO2.11@4174,1750 SERVO2.8@4294,1750 SERVO2.5@4414,1750 SERVO2.2@4534,1750 SERVO1.11@4654,1750 SERVO1.8@4774,1750 SERVO1.5@4894,1750 SERVO1.2@5014,1750
  Bottom Layer w25: 3059,2884 v2(3125,2884) ; 3059,3502 v2(3125,3502) ; 3059,3963 3060.14,3964.14 MDE_STM32F407Z.201@3390,3964.14 MDE_STM32F407Z.200@3490,3964.14 ; 3059,4026 3060,4025 v2(3125,4025) ; 3061,2262 v2(3127,2262) ; MDE_STM32F407Z.201@3377.96,3952.1 ccw(c3348.89,3923.03) 3348.89,3964.14 ccw(c3348.89,4005.25) MDE_STM32F407Z.201@3377.96,3976.18 ; MDE_STM32F407Z.201@3402.04,3952.1 cw(c3431.11,3923.03) 3431.11,3964.14 cw(c3431.11,4005.25) MDE_STM32F407Z.201@3402.04,3976.18 ; MDE_STM32F407Z.200@3477.96,3952.1 ccw(c3448.89,3923.03) 3448.89,3964.14 ccw(c3448.89,4005.25) MDE_STM32F407Z.200@3477.96,3976.18 ; 3541,1400.68 cw(c3567.9,1400.68) v2@3548.88,1419.7 ; v2(3543.57,1425) 3541,1422.43 3541,1350 3541,1346 3544,1343 ; v2(4073,1420) 4073,1353 4076,1350 ; v2(4843,1415) 4843,1350 4843,1348 4846,1345 ; v2(5259,2468) 5326,2468 5329,2471 ; v2(5262,3584) 5329,3584 5332,3587 ; v2(5264,4216) 5329,4216 5331,4216 5334,4219 ; v2(5265,1837) 5329,1837 5332,1837 5335,1840
  Bottom Layer w30: SERVO3.11@3694,1735.47 cw(c3694,1700.4) 3718.8,1725.2 cw(c3743.6,1750) SERVO3.11@3708.53,1750 ; SERVO3.11@3694,1750 3749,1695 3752,1695 3752,1352 3754,1350 ; SERVO3.8@3814,1735.47 cw(c3814,1681.09) 3852.46,1719.54 ; SERVO3.8@3814,1750 3822,1750 3876,1696 3876,1352 3874,1350 ; SERVO3.5@3934,1750 3955,1750 3993,1712 ; SERVO3.5@3934.35,1735.48 cw(c3936.27,1655.28) 3993,1712 ; 3994,1350 3993,1351 3993,1712
  Bottom Layer w50: 3059,4054 3059,4026 3059,3963 3059,3502 3059,2884 3059,2083 3161,1981 3161,1550 3234,1477 3234,1398 3282,1350 3541,1350 3754,1350 3874,1350 3994,1350 4076,1350 4843,1350 5132,1350 5168,1386 5168,1474 5206,1512 5318,1512 5329,1523 5329,1837 5329,2471 5329,3584 5329,4216 ; BEEP.1@4848,4707 4952,4603 5250,4603 5331,4522 5331,4216
VCC_BATTERY: Battery_In1.1 Battery_In2.1 MDE_POWER.1 SERVO.2 | length 2163.3
  Top Layer w50: SERVO.2@3066,4490.43 3206.57,4490.43 Battery_In1.1@3321,4376 ; Battery_In1.1@3296.79,4376 ccw(c3238.33,4376) 3279.67,4417.33 ccw(c3321,4458.67) Battery_In1.1@3321,4400.21
  Top Layer w80: Battery_In2.1@3529,4375 4176,4375 4319,4518 4319,4724 4390,4795 MDE_POWER.1@4564,4795
  Top Layer w100: Battery_In1.1@3321,4376 3528,4376 Battery_In2.1@3529,4375
  Bottom Layer w100: Battery_In1.1@3321,4376 Battery_In2.1@3552,4376
VCC_USB5V: CP2102USB.6 D1.1 | length 770.4
  Top Layer w30: D1.1@5136.73,4473.73 cw(c5111.93,4448.93) 5147,4448.93 cw(c5182.07,4448.93) D1.1@5157.27,4473.73 ; v3(5147,4421) D1.1@5147,4484
  Bottom Layer w30: CP2102USB.6@4753.75,4116.25 ccw(c4728.99,4141.01) 4764,4141.01 ccw(c4799.01,4141.01) CP2102USB.6@4774.25,4116.25 ; CP2102USB.6@4764,4106 4764,4214 4840,4290 5015,4290 v3@5146.5,4421.5 ; 5128.22,4403.22 cw(c5147,4384.44) v3@5147,4411
pads on no net: CAN2_A.3 CAN2_B.3 CP2102USB.1 CP2102USB.2 MDE_POWER.0 MDE_STM32F407Z.1 MDE_STM32F407Z.2 MDE_STM32F407Z.3 MDE_STM32F407Z.4 MDE_STM32F407Z.5 MDE_STM32F407Z.6 MDE_STM32F407Z.7 MDE_STM32F407Z.8 MDE_STM32F407Z.9 MDE_STM32F407Z.10 MDE_STM32F407Z.11 MDE_STM32F407Z.12 MDE_STM32F407Z.13 MDE_STM32F407Z.14 MDE_STM32F407Z.15 MDE_STM32F407Z.18 MDE_STM32F407Z.19 MDE_STM32F407Z.20 MDE_STM32F407Z.21 MDE_STM32F407Z.22 MDE_STM32F407Z.47 MDE_STM32F407Z.48 MDE_STM32F407Z.49 MDE_STM32F407Z.50 MDE_STM32F407Z.53 MDE_STM32F407Z.54 MDE_STM32F407Z.55 MDE_STM32F407Z.56 MDE_STM32F407Z.57 MDE_STM32F407Z.58 MDE_STM32F407Z.73 MDE_STM32F407Z.74 MDE_STM32F407Z.80 MDE_STM32F407Z.85 MDE_STM32F407Z.86 MDE_STM32F407Z.87 MDE_STM32F407Z.88 MDE_STM32F407Z.89 MDE_STM32F407Z.90 MDE_STM32F407Z.91 MDE_STM32F407Z.92 MDE_STM32F407Z.93 MDE_STM32F407Z.100 MDE_STM32F407Z.103 MDE_STM32F407Z.104 MDE_STM32F407Z.110 MDE_STM32F407Z.111 MDE_STM32F407Z.112 MDE_STM32F407Z.113 MDE_STM32F407Z.116 MDE_STM32F407Z.125 MDE_STM32F407Z.126 MDE_STM32F407Z.127 MDE_STM32F407Z.128 MDE_STM32F407Z.129 MDE_STM32F407Z.132 MDE_STM32F407Z.141 MDE_STM32F407Z.142 MDE_STM32F407Z.202 MDE_STM32F407Z.203 MDE_STM32F407Z.207 SWD.1

## Polygon pours and split planes (outlines as drawn)
GND_CHIP on Top Layer "Top Layer-GND" (solid, remove dead copper, pour order 4): 3016,4848 3023,4841 5377,4841 5377,1302 5375,1300 5371,1304 3017,1304 3017,4838 3020,4841
GND_CHIP on Bottom Layer "Bottom Layer-GND" (solid, remove dead copper, pour order 6): 3017,4845 3020,4842 5372,4842 5372,1304 5370,1306 3014,1306 3014,4836 3017,4839

## Keep-outs
Keep-Out Layer:
  lines w10: 3015,4845 3015,1304 5377,1304 5377,4848 3015,4848

## Silkscreen, mask and mechanical layers (free items; w line width, h text height)
Top Overlay:
  lines w10: 3017,1405 3116,1405 3116,1306 ; 3017,4747 3116,4747 3116,4846 ; 5276,1306 5276,1405 5375,1405 ; 5276,4846 5276,4747 5375,4747
Bottom Overlay:
  text "Power:12v" at 3637,4714 h120
  text "USB--TTL" at 4651,4596 h100
  text "SERVO" at 3125,4319 h150 r270
  text "IMU" at 5355.68,4309 h150 r90
  text "UART4" at 3035.32,3885 h150 r270
  text "Terminal" at 5360.51,3804 h150 r90
  text "USART2" at 3034,3321 h150 r270
  text "HANDS FREE" at 4779,3160 h275.59
  text "SWD" at 5357,3091 h150 r90
  text "SPI1" at 3033.56,2800 h150 r270
  text "USART6" at 5357,2673 h150 r90
  text "IIC" at 3034,2208 h150 r270
  text "Motor3" at 5357,2031 h150 r90
  text "SBUS" at 3676,1908.58 h65 r270
  text "PPM" at 3795.34,1908.58 h65 r270
  text "PB15" at 3915.82,1908.58 h65 r270
  text "PB14" at 4035.16,1908.58 h65 r270
  text "PE14" at 4155.07,1908.58 h65 r270
  text "PE13" at 4275.55,1908.58 h65 r270
  text "PE11" at 4394.88,1908.58 h65 r270
  text "PE9" at 4515.36,1908.58 h65 r270
  text "PC9" at 4635.27,1908.58 h65 r270
  text "PC8" at 4755.18,1908.58 h65 r270
  text "PC7" at 4875.09,1908.58 h65 r270
  text "PC6" at 4995,1908.58 h65 r270
  text "Signal" at 3610,1823 h100
  text "VCC5" at 3610,1712.11 h100
  text "CAN" at 3118,1626 h150 r270
  text "GND" at 3610,1618 h100
  text "Motor1" at 3735,1320 h150
  text "GPS" at 4308,1319.85 h150
  text "Motor2" at 5043,1320 h150
  text "SERVO1" at 4998,975 h80
  text "SERVO2" at 4522,956 h80
  text "SERVO3" at 3994,923 h80

## Text inside footprints (layer, text, board x,y; h text height)
BEEP: Top Overlay "+" at 4906,4763 h80 r270
CAN_AX_EEPROM: Top Overlay "VCC3.3V" at 3724,2671.93 h80 r270; Top Overlay "GND" at 3804,2566 h80 r270; Top Overlay "AX_IO" at 3879,2602.19 h80 r270; Top Overlay "AX_DATA" at 3964,2698.25 h80 r270; Top Overlay "USART_RX" at 4044,2716.84 h80 r270; Top Overlay "USART_TX" at 4124,2715.82 h80 r270; Top Overlay "IIC_SCL" at 4204,2633.97 h80 r270; Top Overlay "IIC_SDA" at 4284,2651 h80 r270; Top Overlay "CAN_TX" at 4364,2655.92 h80 r270; Top Overlay "CAN_RX" at 4444,2660.14 h80 r270; Top Overlay "CAN_H" at 4524,2624.99 h80 r270; Top Overlay "CAN_L" at 4604,2614.53 h80 r270
"ControlUnit V1": Bottom Layer "Hands" at 4263,2901 h35; Bottom Layer "Free" at 4213,2851 h35; Bottom Solder "Hands" at 4263,2901 h35; Bottom Solder "Free" at 4213,2851 h35
IMU: Top Overlay "GY86 87" at 3784,3304 h45 r90; Top Overlay "SCL" at 4084,3304 h45 r90; Top Overlay "GND" at 3989,3304 h45 r90; Top Overlay "VCC3.3" at 3889,3304 h45 r90; Top Overlay "SDA" at 4184,3304 h45 r90
MDE_POWER: Top Overlay "ADC:1/11 Vi" at 4136,4542 h35; Top Overlay "GND" at 3801,4637 h35 r90; Top Overlay "VCC3.3V_OUT" at 4136,4622 h35; Top Overlay "VCC5V_OUT" at 4206,4702 h35; Top Overlay "VCC_IN" at 4316,4777 h35; Top Overlay "21.74*23.24mm" at 3736,3947 h39.37; Top Overlay "Vin:6-35V" at 3781,4047 h35; Top Overlay "HandsFree" at 3786,4352 h78.74; Top Overlay "PSupply" at 3786,4257 h59.06; Top Overlay "MDE V1.0" at 3786,4172 h35.43
MDE_STM32F407Z: Top Overlay "GND" at 3451,1964.14 h35; Top Overlay "3.3" at 4795,4103.14 h35 r270; Top Overlay "3.3" at 5055,4103.14 h35 r270; Top Overlay "GND" at 3444,4234.14 h35; Top Overlay "3.3" at 3541,4064.14 h30 r225; Top Overlay "5V" at 3550,3991.14 h35 r270; Top Overlay "VB" at 3290,4094.14 h35 r270; Top Overlay "5V" at 3290,3994.14 h35 r270; Top Overlay "B11" at 3853,2223.14 h35; Top Overlay "B10" at 3852,1964.14 h35; Top Overlay "E15" at 3749,2223.14 h35; Top Overlay "E14" at 3754,1964.14 h35; Top Overlay "E13" at 3652,2223.14 h35; Top Overlay "E12" at 3655,1964.14 h35; Top Overlay "E11" at 3557,2223.14 h35; Top Overlay "E10" at 3556,1964.14 h35; Top Overlay "E9" at 3493,2207.14 h35 r315; Top Overlay "E8" at 3290,2193.14 h35 r270; Top Overlay "E7" at 3410,2322.14 h35 r315; Top Overlay "G1" at 3290,2283.14 h35 r270; Top Overlay "G0" at 3550,2391.14 h35 r270; Top Overlay "F15" at 3290,2400.14 h35 r270; Top Overlay "F14" at 3550,2503.14 h35 r270; Top Overlay "F13" at 3290,2507.14 h35 r270; Top Overlay "F12" at 3550,2603.14 h35 r270; Top Overlay "F11" at 3290,2605.14 h35 r270; Top Overlay "B2" at 3550,2693.14 h35 r270; Top Overlay "B1" at 3290,2688.14 h35 r270; Top Overlay "B0" at 3550,2794.14 h35 r270; Top Overlay "C5" at 3290,2793.14 h35 r270; Top Overlay "C4" at 3550,2892.14 h35 r270; Top Overlay "A7" at 3290,2891.14 h35 r270; Top Overlay "A6" at 3550,2986.14 h35 r270; Top Overlay "A5" at 3290,2994.14 h35 r270; Top Overlay "A4" at 3550,3098.14 h35 r270; Top Overlay "A3" at 3290,3095.14 h35 r270; Top Overlay "A1" at 3290,3188.14 h35 r270; Top Overlay "A2" at 3550,3193.14 h35 r270; Top Overlay "A0" at 3550,3293.14 h35 r270; Top Overlay "C3" at 3290,3294.14 h35 r270; Top Overlay "C2" at 3550,3392.14 h35 r270; Top Overlay "C1" at 3290,3389.14 h35 r270; Top Overlay "C0" at 3550,3493.14 h35 r270; Top Overlay "F10" at 3290,3506.14 h35 r270; Top Overlay "F9" at 3550,3588.14 h35 r270; Top Overlay "F8" at 3290,3594.14 h35 r270; Top Overlay "F7" at 3550,3687.14 h35 r270; Top Overlay "F6" at 3290,3694.14 h35 r270; Top Overlay "F5" at 3550,3792.14 h35 r270; Top Overlay "F4" at 3290,3791.14 h35 r270; Top Overlay "F3" at 3550,3891.14 h35 r270; Top Overlay "F2" at 3290,3893.14 h35 r270; Top Overlay "F1" at 3637,4136.14 h30 r225; Top Overlay "F0" at 3562,4234.14 h35; Top Overlay "C15" at 3649,3962.14 h35; Top Overlay "C14" at 3651,4234.14 h35; Top Overlay "C13" at 3748,3962.14 h35; Top Overlay "E6" at 3762,4234.14 h35; Top Overlay "E5" at 3866,3962.14 h35; Top Overlay "E4" at 3863,4234.14 h35; Top Overlay "E3" at 3967,3962.14 h35; Top Overlay "E2" at 3961,4234.14 h35; Top Overlay "E1" at 4078,3962.14 h35; Top Overlay "E0" at 4058,4234.14 h35; Top Overlay "B12" at 3954,1964.14 h35; Top Overlay "B13" at 3951,2223.14 h35; Top Overlay "B14" at 4058,1964.14 h35; Top Overlay "B15" at 4048,2223.14 h35; Top Overlay "D8" at 4167,1964.14 h35; Top Overlay "D9" at 4161,2223.14 h35; Top Overlay "D10" at 4249,1964.14 h35; Top Overlay "D11" at 4256,2223.14 h35; Top Overlay "D12" at 4353,1964.14 h35; Top Overlay "D13" at 4351,2223.14 h35; Top Overlay "D14" at 4455,1964.14 h35; Top Overlay "D15" at 4450,2223.14 h35; Top Overlay "G2" at 4564,1964.14 h35; Top Overlay "G3" at 4563,2223.14 h35; Top Overlay "G5" at 4662,2223.14 h35; Top Overlay "G4" at 4664,1964.14 h35; Top Overlay "G6" at 4764,1964.14 h35; Top Overlay "G7" at 4750,2148.14 h30 r225; Top Overlay "C6" at 4860,2228.14 h30 r225; Top Overlay "G8" at 5055,2192.14 h35 r270; Top Overlay "C8" at 4795,2296.14 h35 r270; Top Overlay "C7" at 5055,2291.14 h35 r270; Top Overlay "A8" at 4795,2393.14 h35 r270; Top Overlay "C9" at 5055,2397.14 h35 r270; Top Overlay "A10" at 4795,2502.14 h35 r270; Top Overlay "A9" at 5055,2497.14 h35 r270; Top Overlay "A12" at 4795,2604.14 h35 r270; Top Overlay "A11" at 5055,2596.14 h35 r270; Top Overlay "A14" at 4795,2707.14 h35 r270; Top Overlay "A13" at 5055,2701.14 h35 r270; Top Overlay "A15" at 5055,2805.14 h35 r270; Top Overlay "C10" at 4795,2804.14 h35 r270; Top Overlay "C12" at 4795,2907.14 h35 r270; Top Overlay "C11" at 5055,2903.14 h35 r270; Top Overlay "D0" at 5055,2993.14 h35 r270; Top Overlay "D1" at 4795,2984.14 h35 r270; Top Overlay "D3" at 4795,3094.14 h35 r270; Top Overlay "D2" at 5055,3089.14 h35 r270; Top Overlay "D5" at 4795,3188.14 h35 r270; Top Overlay "D4" at 5055,3190.14 h35 r270; Top Overlay "D7" at 4795,3293.14 h35 r270; Top Overlay "D6" at 5055,3293.14 h35 r270; Top Overlay "G9" at 5055,3392.14 h35 r270; Top Overlay "G10" at 4795,3404.14 h35 r270; Top Overlay "G11" at 5055,3500.14 h35 r270; Top Overlay "G12" at 4795,3507.14 h35 r270; Top Overlay "G13" at 5055,3607.14 h35 r270; Top Overlay "G14" at 4795,3608.14 h35 r270; Top Overlay "B3" at 4795,3693.14 h35 r270; Top Overlay "G15" at 5055,3710.14 h35 r270; Top Overlay "B9" at 4795,3992.14 h35 r270; Top Overlay "B8" at 5055,3991.14 h35 r270; Top Overlay "B5" at 4795,3791.14 h35 r270; Top Overlay "B4" at 5055,3795.14 h35 r270; Top Overlay "B7" at 4795,3891.14 h35 r270; Top Overlay "B6" at 5055,3895.14 h35 r270; Top Overlay "GND" at 5055,4216.14 h35 r270; Top Overlay "GND" at 3307,2036.14 h30 r315; Top Overlay "GND" at 4854,1970.14 h30; Top Overlay "GND" at 5048,2056.14 h30 r225; Top Overlay "GND" at 3358,4245.14 h30 r225; Top Overlay "GND" at 4795,4216.14 h35 r270